# EAGLE board lv1-imu-accel-1 (EAGLE 3.55)
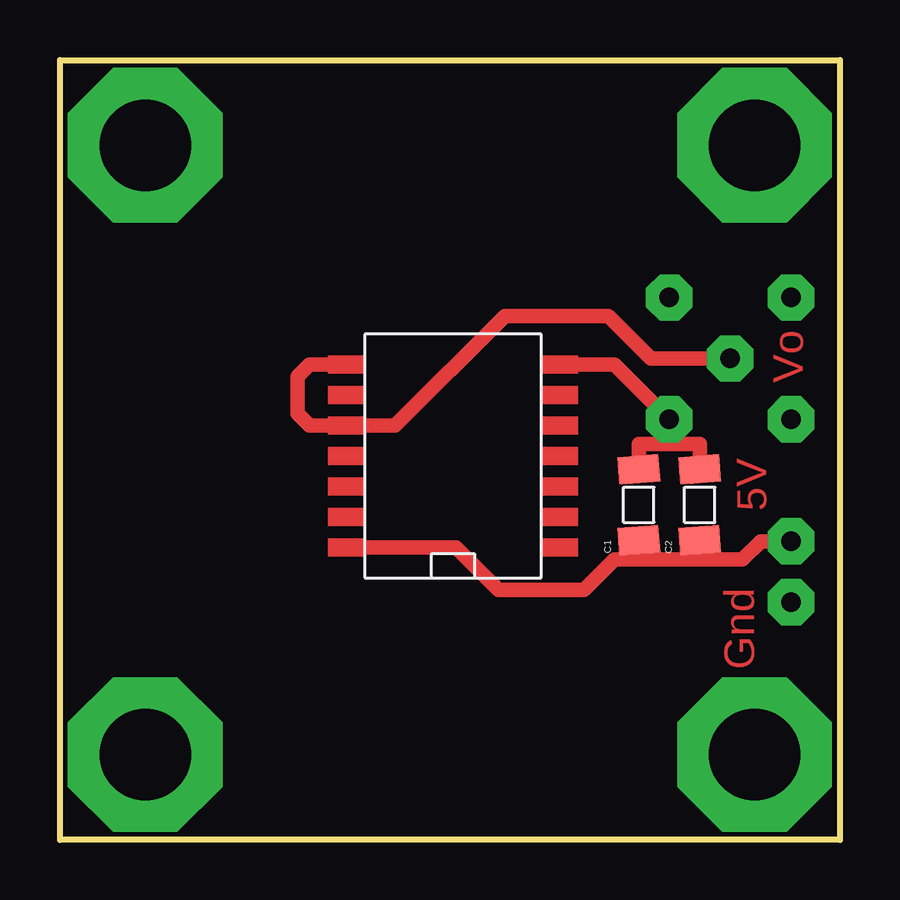
[diagram p0: board, top side]
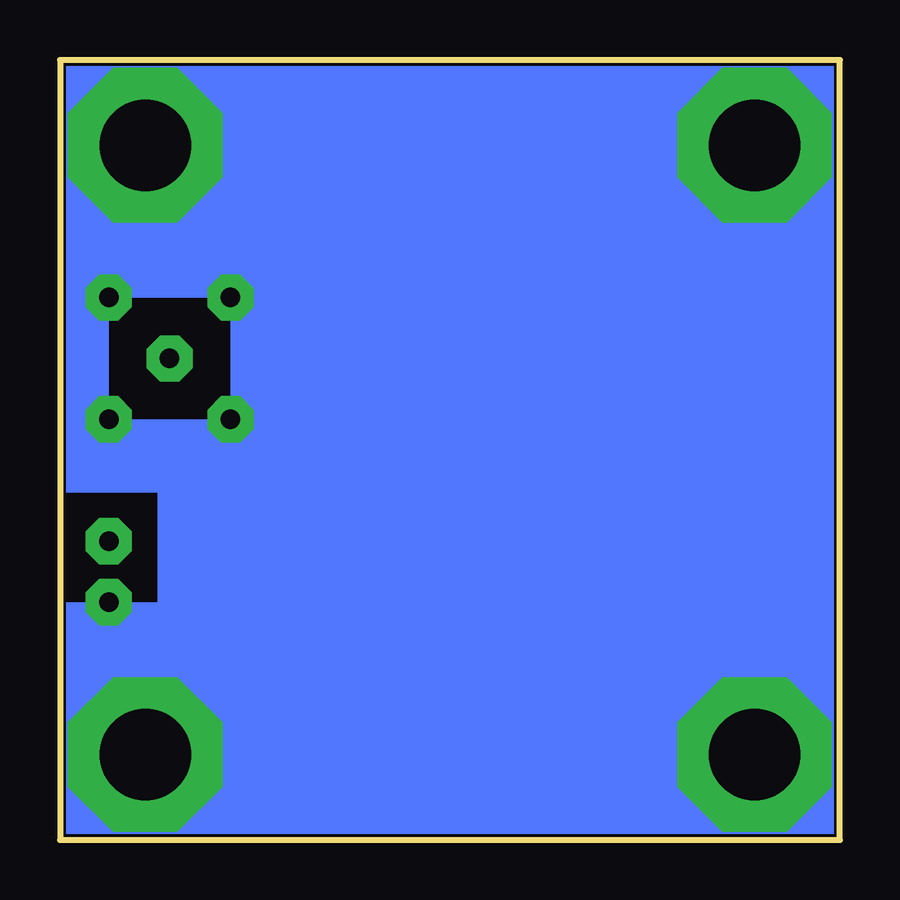
[diagram p1: board, bottom side, seen from below]

Size 32.51 x 32.51 mm. Coordinates in mm from the lower left corner, seen from the top.
Outline: 0,0 0,32.51 32.51,32.51 32.51,0 0,0
Copper layers used: Top

## Footprints (pad centres in the part's own frame; a part is rotated, then mirrored left to right if it is on the bottom)
06 = smd 1.143 x 1.702 rotated 4.4:  1.473,0 | smd 1.143 x 1.702 rotated 4.3:  -1.473,0

## Placement (x,y rotation side)
C1  100nF  [06]  24.13,13.97 90 top
C2  1uF  [06]  26.67,13.97 90 top
E$1  [-14]  16.26,16.26 90 top

## Library data of the parts
C1 C2 = SMD
E$1 = SMD-IC

## Tracks (layer width: path | path; a pad name or v marks a point on that pad's centre or on a via)
S$4  (via drill 3.81 pad 6.45)
  other vias: 3.56,3.56
S$5  (via drill 3.81 pad 6.45)
  other vias: 3.56,28.96
S$7
  Top 0.61: 11.43,19.81 10.41,19.81 9.91,19.3 9.91,17.78 10.41,17.27 11.43,17.27
S$8  (via drill 3.81 pad 6.45)
  other vias: 28.96,28.96
S$9  (via drill 3.81 pad 6.45)
  other vias: 28.96,3.56
S$10  (via drill 0.81 pad 1.93)
  other vias: 30.48,9.91
S$11  (via drill 0.81 pad 1.93)
  Top 0.61: v27.94,20.07 24.64,20.07 22.86,21.84 18.54,21.84 13.97,17.27 12.45,17.27
S$12  (via drill 0.81 pad 1.93)
  Top 0.61: 12.45,12.19 16.51,12.19 18.29,10.41 21.84,10.41 23.11,11.68 28.45,11.68 29.21,12.45 v30.48,12.45
S$13  (via drill 0.81 pad 1.93)
  other vias: 30.48,17.53
S$14  (via drill 0.81 pad 1.93)
  Top 0.61: 24.13,15.75 24.13,16.51 25.4,16.51 | 25.4,16.51 26.67,16.51 26.67,15.75 | 21.08,19.81 23.11,19.81 v25.4,17.53 25.4,16.51
S$15  (via drill 0.81 pad 1.93)
  other vias: 30.48,22.61
S$16  (via drill 0.81 pad 1.93)
  other vias: 25.4,22.61
(copper drawn outside any net)
  shapes: Bottom area x6

## Text on the board
Top: Vo | 5V | Gnd